# Altium PCB PCB1.PcbDoc
Units mm, origin at the board's own origin, x right, y up, seen from the top; angles counter-clockwise.
Board outline 55 x 34 mm, 2 copper layers (Top Layer, Bottom Layer); 146 components, 18 nets, 318 pads, 131 vias.
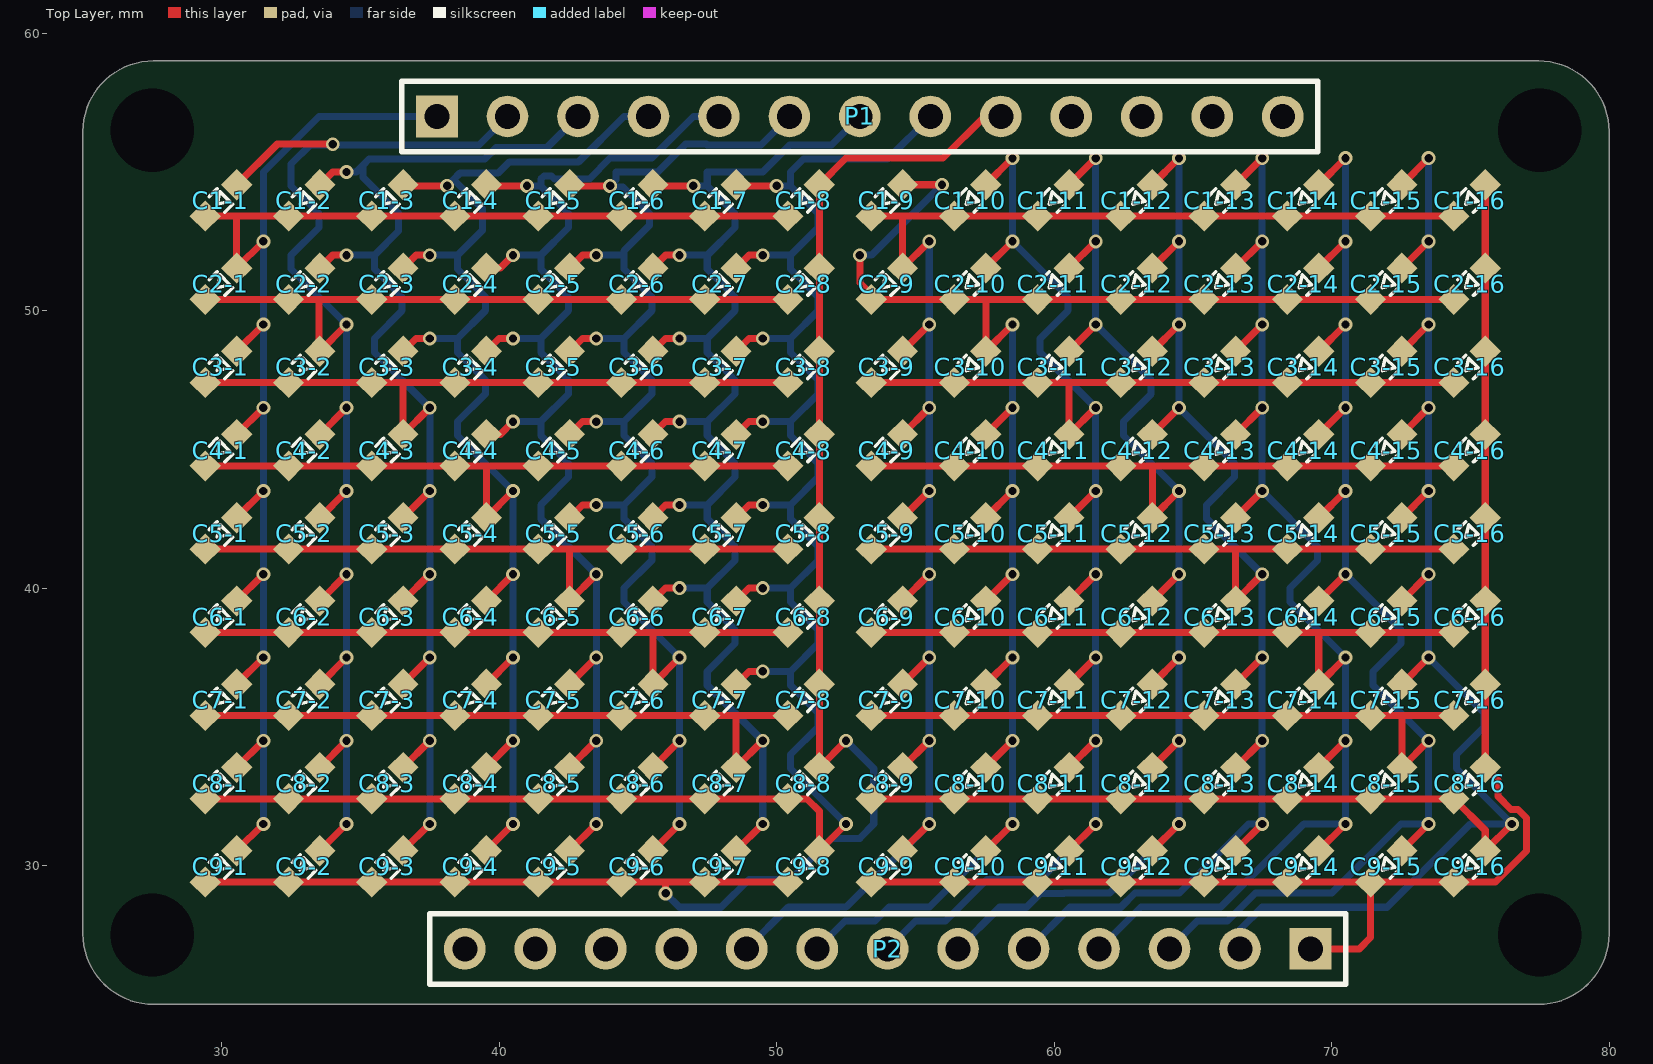
[diagram p0: Top Layer view]
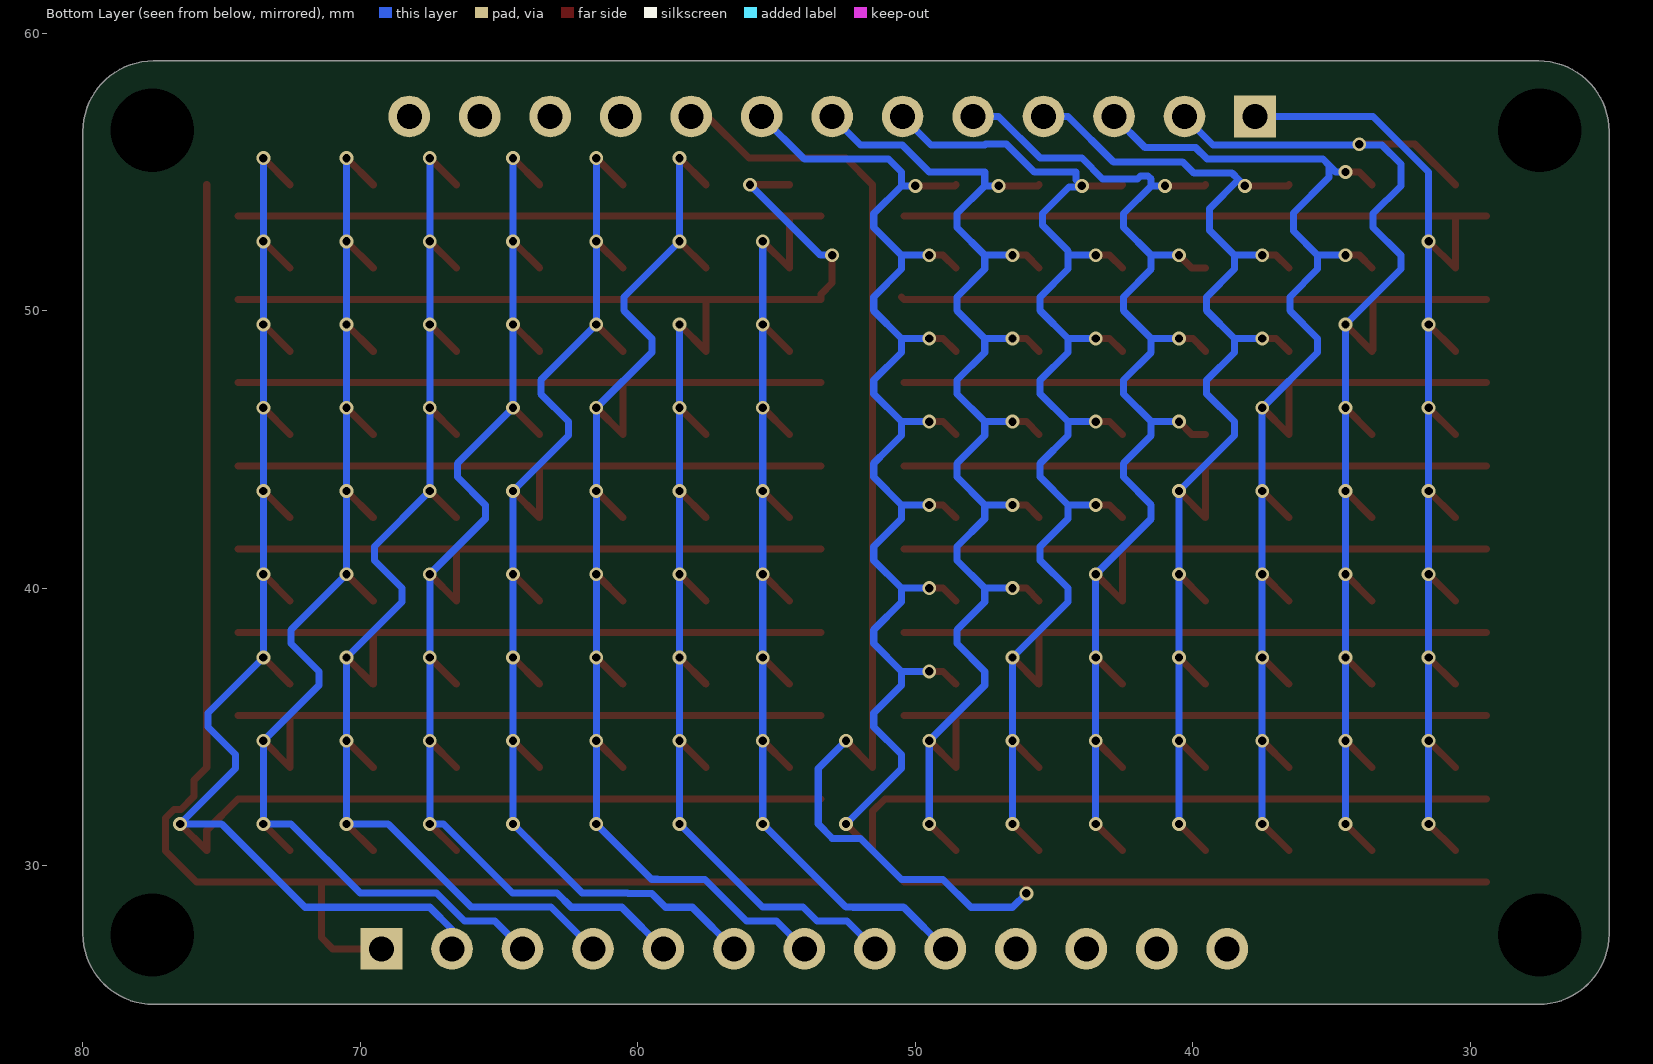
[diagram p1: Bottom Layer view, seen from below]

## Layer stack, top to bottom
Top Solder: solder mask 0.0102, Solder Resist, Dk 3.5
Top Layer: signal copper 0.0356
Dielectric 1: dielectric 0.32, FR-4, Dk 4.8
Bottom Layer: signal copper 0.0356
Bottom Solder: solder mask 0.0102, Solder Resist, Dk 3.5

## Board outline
77.46,59 cw(c77.46,56.46) 80,56.46 80,27.54 cw(c77.46,27.54) 77.46,25 27.54,25 cw(c27.54,27.54) 25,27.54 25,56.46 cw(c27.54,56.46) 27.54,59

## Design rules (kind name [scope] priority, off if disabled: settings)
Clearance [All] p1: gap=0.152 ignorepadtopadclearanceinfootprint=FALSE except(0: Arc-Hole Track-Hole SMDPad-Hole THPad-Hole Via-Hole Fill-Hole Poly-Hole Region-Hole Text-Hole; 0.254: Arc-Arc Arc-Track Track-Track)
ComponentClearance [All] p1: gap=0 collisioncheckmode=3 verticalgap=0.254 showdistances=FALSE
PolygonConnect [All] p1: connectstyle=Relief reliefconductorwidth=0.254 reliefentries=4 polygonreliefangle="90 Angle" airgapwidth=0.254
RoutingVias [All] p1: holewidth=0.3 width=0.5 viastyle="Through Hole" minholewidth=0.3 minwidth=0.5 maxholewidth=0.3 maxwidth=0.5
SolderMaskExpansion [All] p1: expansion=0.102
Width [All] p1: maxlimit=0.254 minlimit=0.254 preferedwidth=0.254
29 further rules are at their usual default settings.

## Components (designator, comment, footprint, x,y, rotation, side; value= is the part's Value field where it differs from the comment)
C1-1 "LED" "LED 0603(2)" 30,54 r225 bottom
C1-2 "LED" "LED 0603(2)" 33,54 r225 bottom
C1-3 "LED" "LED 0603(2)" 36,54 r225 bottom
C1-4 "LED" "LED 0603(2)" 39,54 r225 bottom
C1-5 "LED" "LED 0603(2)" 42,54 r225 bottom
C1-6 "LED" "LED 0603(2)" 45,54 r225 bottom
C1-7 "LED" "LED 0603(2)" 48,54 r225 bottom
C1-8 "LED" "LED 0603(2)" 51,54 r225 bottom
C1-9 "LED" "LED 0603(2)" 54,54 r225 bottom
C1-10 "LED" "LED 0603(2)" 57,54 r225 bottom
C1-11 "LED" "LED 0603(2)" 60,54 r225 bottom
C1-12 "LED" "LED 0603(2)" 63,54 r225 bottom
C1-13 "LED" "LED 0603(2)" 66,54 r225 bottom
C1-14 "LED" "LED 0603(2)" 69,54 r225 bottom
C1-15 "LED" "LED 0603(2)" 72,54 r225 bottom
C1-16 "LED" "LED 0603(2)" 75,54 r225 bottom
C2-1 "LED" "LED 0603(2)" 30,51 r225 bottom
C2-2 "LED" "LED 0603(2)" 33,51 r225 bottom
C2-3 "LED" "LED 0603(2)" 36,51 r225 bottom
C2-4 "LED" "LED 0603(2)" 39,51 r225 bottom
C2-5 "LED" "LED 0603(2)" 42,51 r225 bottom
C2-6 "LED" "LED 0603(2)" 45,51 r225 bottom
C2-7 "LED" "LED 0603(2)" 48,51 r225 bottom
C2-8 "LED" "LED 0603(2)" 51,51 r225 bottom
C2-9 "LED" "LED 0603(2)" 54,51 r225 bottom
C2-10 "LED" "LED 0603(2)" 57,51 r225 bottom
C2-11 "LED" "LED 0603(2)" 60,51 r225 bottom
C2-12 "LED" "LED 0603(2)" 63,51 r225 bottom
C2-13 "LED" "LED 0603(2)" 66,51 r225 bottom
C2-14 "LED" "LED 0603(2)" 69,51 r225 bottom
C2-15 "LED" "LED 0603(2)" 72,51 r225 bottom
C2-16 "LED" "LED 0603(2)" 75,51 r225 bottom
C3-1 "LED" "LED 0603(2)" 30,48 r225 bottom
C3-2 "LED" "LED 0603(2)" 33,48 r225 bottom
C3-3 "LED" "LED 0603(2)" 36,48 r225 bottom
C3-4 "LED" "LED 0603(2)" 39,48 r225 bottom
C3-5 "LED" "LED 0603(2)" 42,48 r225 bottom
C3-6 "LED" "LED 0603(2)" 45,48 r225 bottom
C3-7 "LED" "LED 0603(2)" 48,48 r225 bottom
C3-8 "LED" "LED 0603(2)" 51,48 r225 bottom
C3-9 "LED" "LED 0603(2)" 54,48 r225 bottom
C3-10 "LED" "LED 0603(2)" 57,48 r225 bottom
C3-11 "LED" "LED 0603(2)" 60,48 r225 bottom
C3-12 "LED" "LED 0603(2)" 63,48 r225 bottom
C3-13 "LED" "LED 0603(2)" 66,48 r225 bottom
C3-14 "LED" "LED 0603(2)" 69,48 r225 bottom
C3-15 "LED" "LED 0603(2)" 72,48 r225 bottom
C3-16 "LED" "LED 0603(2)" 75,48 r225 bottom
C4-1 "LED" "LED 0603(2)" 30,45 r225 bottom
C4-2 "LED" "LED 0603(2)" 33,45 r225 bottom
C4-3 "LED" "LED 0603(2)" 36,45 r225 bottom
C4-4 "LED" "LED 0603(2)" 39,45 r225 bottom
C4-5 "LED" "LED 0603(2)" 42,45 r225 bottom
C4-6 "LED" "LED 0603(2)" 45,45 r225 bottom
C4-7 "LED" "LED 0603(2)" 48,45 r225 bottom
C4-8 "LED" "LED 0603(2)" 51,45 r225 bottom
C4-9 "LED" "LED 0603(2)" 54,45 r225 bottom
C4-10 "LED" "LED 0603(2)" 57,45 r225 bottom
C4-11 "LED" "LED 0603(2)" 60,45 r225 bottom
C4-12 "LED" "LED 0603(2)" 63,45 r225 bottom
C4-13 "LED" "LED 0603(2)" 66,45 r225 bottom
C4-14 "LED" "LED 0603(2)" 69,45 r225 bottom
C4-15 "LED" "LED 0603(2)" 72,45 r225 bottom
C4-16 "LED" "LED 0603(2)" 75,45 r225 bottom
C5-1 "LED" "LED 0603(2)" 30,42 r225 bottom
C5-2 "LED" "LED 0603(2)" 33,42 r225 bottom
C5-3 "LED" "LED 0603(2)" 36,42 r225 bottom
C5-4 "LED" "LED 0603(2)" 39,42 r225 bottom
C5-5 "LED" "LED 0603(2)" 42,42 r225 bottom
C5-6 "LED" "LED 0603(2)" 45,42 r225 bottom
C5-7 "LED" "LED 0603(2)" 48,42 r225 bottom
C5-8 "LED" "LED 0603(2)" 51,42 r225 bottom
C5-9 "LED" "LED 0603(2)" 54,42 r225 bottom
C5-10 "LED" "LED 0603(2)" 57,42 r225 bottom
C5-11 "LED" "LED 0603(2)" 60,42 r225 bottom
C5-12 "LED" "LED 0603(2)" 63,42 r225 bottom
C5-13 "LED" "LED 0603(2)" 66,42 r225 bottom
C5-14 "LED" "LED 0603(2)" 69,42 r225 bottom
C5-15 "LED" "LED 0603(2)" 72,42 r225 bottom
C5-16 "LED" "LED 0603(2)" 75,42 r225 bottom
C6-1 "LED" "LED 0603(2)" 30,39 r225 bottom
C6-2 "LED" "LED 0603(2)" 33,39 r225 bottom
C6-3 "LED" "LED 0603(2)" 36,39 r225 bottom
C6-4 "LED" "LED 0603(2)" 39,39 r225 bottom
C6-5 "LED" "LED 0603(2)" 42,39 r225 bottom
C6-6 "LED" "LED 0603(2)" 45,39 r225 bottom
C6-7 "LED" "LED 0603(2)" 48,39 r225 bottom
C6-8 "LED" "LED 0603(2)" 51,39 r225 bottom
C6-9 "LED" "LED 0603(2)" 54,39 r225 bottom
C6-10 "LED" "LED 0603(2)" 57,39 r225 bottom
C6-11 "LED" "LED 0603(2)" 60,39 r225 bottom
C6-12 "LED" "LED 0603(2)" 63,39 r225 bottom
C6-13 "LED" "LED 0603(2)" 66,39 r225 bottom
C6-14 "LED" "LED 0603(2)" 69,39 r225 bottom
C6-15 "LED" "LED 0603(2)" 72,39 r225 bottom
C6-16 "LED" "LED 0603(2)" 75,39 r225 bottom
C7-1 "LED" "LED 0603(2)" 30,36 r225 bottom
C7-2 "LED" "LED 0603(2)" 33,36 r225 bottom
C7-3 "LED" "LED 0603(2)" 36,36 r225 bottom
C7-4 "LED" "LED 0603(2)" 39,36 r225 bottom
C7-5 "LED" "LED 0603(2)" 42,36 r225 bottom
C7-6 "LED" "LED 0603(2)" 45,36 r225 bottom
C7-7 "LED" "LED 0603(2)" 48,36 r225 bottom
C7-8 "LED" "LED 0603(2)" 51,36 r225 bottom
C7-9 "LED" "LED 0603(2)" 54,36 r225 bottom
C7-10 "LED" "LED 0603(2)" 57,36 r225 bottom
C7-11 "LED" "LED 0603(2)" 60,36 r225 bottom
C7-12 "LED" "LED 0603(2)" 63,36 r225 bottom
C7-13 "LED" "LED 0603(2)" 66,36 r225 bottom
C7-14 "LED" "LED 0603(2)" 69,36 r225 bottom
C7-15 "LED" "LED 0603(2)" 72,36 r225 bottom
C7-16 "LED" "LED 0603(2)" 75,36 r225 bottom
C8-1 "LED" "LED 0603(2)" 30,33 r225 bottom
C8-2 "LED" "LED 0603(2)" 33,33 r225 bottom
C8-3 "LED" "LED 0603(2)" 36,33 r225 bottom
C8-4 "LED" "LED 0603(2)" 39,33 r225 bottom
C8-5 "LED" "LED 0603(2)" 42,33 r225 bottom
C8-6 "LED" "LED 0603(2)" 45,33 r225 bottom
C8-7 "LED" "LED 0603(2)" 48,33 r225 bottom
C8-8 "LED" "LED 0603(2)" 51,33 r225 bottom
C8-9 "LED" "LED 0603(2)" 54,33 r225 bottom
C8-10 "LED" "LED 0603(2)" 57,33 r225 bottom
C8-11 "LED" "LED 0603(2)" 60,33 r225 bottom
C8-12 "LED" "LED 0603(2)" 63,33 r225 bottom
C8-13 "LED" "LED 0603(2)" 66,33 r225 bottom
C8-14 "LED" "LED 0603(2)" 69,33 r225 bottom
C8-15 "LED" "LED 0603(2)" 72,33 r225 bottom
C8-16 "LED" "LED 0603(2)" 75,33 r225 bottom
C9-1 "LED" "LED 0603(2)" 30,30 r225 bottom
C9-2 "LED" "LED 0603(2)" 33,30 r225 bottom
C9-3 "LED" "LED 0603(2)" 36,30 r225 bottom
C9-4 "LED" "LED 0603(2)" 39,30 r225 bottom
C9-5 "LED" "LED 0603(2)" 42,30 r225 bottom
C9-6 "LED" "LED 0603(2)" 45,30 r225 bottom
C9-7 "LED" "LED 0603(2)" 48,30 r225 bottom
C9-8 "LED" "LED 0603(2)" 51,30 r225 bottom
C9-9 "LED" "LED 0603(2)" 54,30 r225 bottom
C9-10 "LED" "LED 0603(2)" 57,30 r225 bottom
C9-11 "LED" "LED 0603(2)" 60,30 r225 bottom
C9-12 "LED" "LED 0603(2)" 63,30 r225 bottom
C9-13 "LED" "LED 0603(2)" 66,30 r225 bottom
C9-14 "LED" "LED 0603(2)" 69,30 r225 bottom
C9-15 "LED" "LED 0603(2)" 72,30 r225 bottom
C9-16 "LED" "LED 0603(2)" 75,30 r225 bottom
P1 "Header 13" HDR1X13 37.76,57 r0 top
P2 "Header 13" HDR1X13 69.24,27 r180 top

## Footprints (in the part's own frame and the unit in brackets; to place one, negate y for a bottom-side part, rotate by r counter-clockwise, add the part's x,y. Pads: shape width x height; smd on the part's side, far side on the other; paste and mask are expansions set on the pad)
HDR1X13 [mm] "Connector; Header; 13 Position"
  rect 1.5x1.5 hole 0.9: 1(0,0)
  round 1.5 hole 0.9: 2(2.54,0) 3(5.08,0) 4(7.62,0) 5(10.16,0) 6(12.7,0) 7(15.24,0) 8(17.78,0) 9(20.32,0) 10(22.86,0) 11(25.4,0) 12(27.94,0) 13(30.48,0)
  silkscreen extent -1.27,-1.27 31.75,1.27
"LED 0603(2)" [mm]
  rect 0.8x0.8 smd far side: 1(-0.762,0) 2(0.838,0)

## Part data
P1 P2: "Header, 13-Pin", LatestRevisionDate=17-Jul-2002, LatestRevisionNote="Re-released for DXP Platform.", Publisher="Altium Limited"

## Free pads (board coordinates)
  round 0 hole 3: 1(27.5,56.5) 2(77.5,56.5) 3(27.5,27.5) 4(77.5,27.5)

## Via types
v1: diameter 0.5, hole 0.3, Top Layer to Bottom Layer, 131 vias

## Nets (pads, with @x,y where several pads share a name; then routed paths per layer and width w, separated by ;. In a path a pad name is that pad's centre, name@x,y a point inside that pad or via, vN(x,y) a via of type N, cw(c..) or ccw(c..) an arc to the next point about the centre after c; other vN are vias at no path point)
CA1: C1-1.2 C1-2.2 C1-3.2 C1-4.2 C1-5.2 C1-6.2 C1-7.2 C1-8.2 C2-1.1 C3-1.1 C4-1.1 C5-1.1 C6-1.1 C7-1.1 C8-1.1 C9-1.1 P1.1 | length 64.3
  Top Layer w0.254: C1-1.2 30.5,53.407 ; C9-1.1 v1(31.5,31.5) ; C8-1.1 v1(31.5,34.5) ; C7-1.1 v1(31.5,37.5) ; C6-1.1 v1(31.5,40.5) ; C5-1.1 v1(31.5,43.5) ; C4-1.1 v1(31.5,46.5) ; C3-1.1 v1(31.5,49.5) ; v1(31.5,52.5) C2-1.1 30.539,53.369 30.5,53.407 ; C1-8.2 C1-7.2 C1-6.2 C1-5.2 C1-4.2 C1-3.2 C1-2.2 30.5,53.407
  Bottom Layer w0.254: v1(31.5,31.5) v1(31.5,34.5) v1(31.5,37.5) v1(31.5,40.5) v1(31.5,43.5) v1(31.5,46.5) v1(31.5,49.5) v1(31.5,52.5) 31.5,55 33.5,57 P1.1
CA2: C1-1.1 C2-1.2 C2-2.2 C2-3.2 C2-4.2 C2-5.2 C2-6.2 C2-7.2 C2-8.2 C3-2.1 C4-2.1 C5-2.1 C6-2.1 C7-2.1 C8-2.1 C9-2.1 P1.2 | length 70.5
  Top Layer w0.254: C2-1.2 C2-2.2 33.5,50.407 ; C1-1.1 32,56 v1(34,56) ; C9-2.1 v1(34.5,31.5) ; C8-2.1 v1(34.5,34.5) ; C7-2.1 v1(34.5,37.5) ; C6-2.1 v1(34.5,40.5) ; C5-2.1 v1(34.5,43.5) ; C4-2.1 v1(34.5,46.5) ; v1(34.5,49.5) C3-2.1 33.5,48.578 33.5,50.407 ; C2-8.2@50.5,50.5 C2-8.2 C2-7.2 C2-6.2 C2-5.2 C2-4.2 C2-3.2 33.5,50.407
  Bottom Layer w0.254: v1(34.5,31.5) v1(34.5,34.5) v1(34.5,37.5) v1(34.5,40.5) v1(34.5,43.5) v1(34.5,46.5) v1(34.5,49.5) 32.5,51.5 32.5,52 33.5,53 33.5,53.5 32.5,54.5 32.5,55.282 33.189,55.971 39.271,55.971 P1.2
CA3: C1-2.1 C2-2.1 C3-1.2 C3-2.2 C3-3.2 C3-4.2 C3-5.2 C3-6.2 C3-7.2 C3-8.2 C4-3.1 C5-3.1 C6-3.1 C7-3.1 C8-3.1 C9-3.1 P1.3 | length 69.8
  Top Layer w0.254: C3-1.2 C3-2.2 C3-3.2 36.5,47.407 ; C2-2.1 34,52 v1(34.5,52) ; C1-2.1 34,55 v1(34.5,55) ; C9-3.1 v1(37.5,31.5) ; C8-3.1 v1(37.5,34.5) ; C7-3.1 v1(37.5,37.5) ; C6-3.1 v1(37.5,40.5) ; C5-3.1 v1(37.5,43.5) ; v1(37.5,46.5) C4-3.1 36.539,47.369 36.5,47.407 ; C3-8.2 C3-7.2 C3-6.2 C3-5.2 C3-4.2 36.5,47.407
  Bottom Layer w0.254: v1(34.5,52) 35.5,52 ; v1(34.5,55) 34.85,55 35.1,55.25 ; v1(37.5,31.5) v1(37.5,34.5) v1(37.5,37.5) v1(37.5,40.5) v1(37.5,43.5) v1(37.5,46.5) 35.5,48.5 35.5,49 36.5,50 36.5,50.5 35.5,51.5 35.5,52 ; P1.3 41.715,55.875 39.893,55.875 39.481,55.463 35.313,55.463 35.1,55.25 ; 35.1,55.25 35.1,54.8 36.375,53.525 36.375,52.875 35.5,52
CA4: C1-3.1 C2-3.1 C3-3.1 C4-1.2 C4-2.2 C4-3.2 C4-4.2 C4-5.2 C4-6.2 C4-7.2 C4-8.2 C5-4.1 C6-4.1 C7-4.1 C8-4.1 C9-4.1 P1.4 | length 70.4
  Top Layer w0.254: C4-1.2 C4-2.2 C4-3.2 C4-4.2 39.5,44.407 ; C3-3.1 37,49 v1(37.5,49) ; C2-3.1 37,52 v1(37.5,52) ; C1-3.1 36.578,54.5 v1(38.125,54.5) ; C9-4.1 v1(40.5,31.5) ; C8-4.1 v1(40.5,34.5) ; C7-4.1 v1(40.5,37.5) ; C6-4.1 v1(40.5,40.5) ; v1(40.5,43.5) C5-4.1 39.539,44.369 39.5,44.407 ; C4-8.2 C4-7.2 C4-6.2 C4-5.2 39.5,44.407
  Bottom Layer w0.254: v1(37.5,49) 38.5,49 ; v1(37.5,52) 38.5,52 ; v1(38.125,54.5) 38.35,54.725 ; v1(40.5,31.5) v1(40.5,34.5) v1(40.5,37.5) v1(40.5,40.5) v1(40.5,43.5) 38.5,45.5 38.5,46 39.5,47 39.5,47.5 38.5,48.5 38.5,49 ; P1.4 44.5,57 42.867,55.367 40.367,55.367 39.955,54.955 38.58,54.955 38.35,54.725 ; 38.35,54.725 39.4,53.675 39.4,52.9 38.5,52 ; 38.5,49 39.5,50 39.5,50.5 38.5,51.5 38.5,52
CA5: C1-4.1 C2-4.1 C3-4.1 C4-4.1 C5-1.2 C5-2.2 C5-3.2 C5-4.2 C5-5.2 C5-6.2 C5-7.2 C5-8.2 C6-5.1 C7-5.1 C8-5.1 C9-5.1 P1.5 | length 71.6
  Top Layer w0.254: C5-1.2 C5-2.2 C5-3.2 C5-4.2 C5-5.2 42.5,41.407 ; C4-4.1 40.039,45.539 v1(40.5,46) ; C3-4.1 40,49 v1(40.5,49) ; C2-4.1 40.039,51.539 v1(40.5,52) ; C1-4.1 39.578,54.5 v1(41,54.5) ; C9-5.1 v1(43.5,31.5) ; C8-5.1 v1(43.5,34.5) ; C7-5.1 v1(43.5,37.5) ; v1(43.5,40.5) C6-5.1 42.539,41.369 42.5,41.407 ; C5-8.2 C5-7.2 C5-6.2 42.5,41.407
  Bottom Layer w0.254: v1(40.5,46) 41.5,46 ; v1(40.5,49) 41.5,49 ; v1(40.5,52) 41.5,52 ; v1(41,54.5) 41.5,54.5 ; v1(43.5,31.5) v1(43.5,34.5) v1(43.5,37.5) v1(43.5,40.5) 41.5,42.5 41.5,43 42.5,44 42.5,44.5 41.5,45.5 41.5,46 ; P1.5 47,57 45.5,55.5 44,55.5 43.25,54.75 42,54.75 41.891,54.859 41.609,54.859 41.5,54.75 41.5,54.5 ; 41.5,46 42.5,47 42.5,47.5 41.5,48.5 41.5,49 ; 41.5,49 42.5,50 42.5,50.5 41.5,51.5 41.5,52 ; 41.5,52 42.5,53 42.5,53.5 41.5,54.5
CA6: C1-5.1 C2-5.1 C3-5.1 C4-5.1 C5-5.1 C6-1.2 C6-2.2 C6-3.2 C6-4.2 C6-5.2 C6-6.2 C6-7.2 C6-8.2 C7-6.1 C8-6.1 C9-6.1 P1.6 | length 72.8
  Top Layer w0.254: C6-1.2 C6-2.2 C6-3.2 C6-4.2 C6-5.2 C6-6.2 45.5,38.407 ; C5-5.1 43,43 v1(43.5,43) ; C4-5.1 43,46 v1(43.5,46) ; C3-5.1 43,49 v1(43.5,49) ; C2-5.1 43,52 v1(43.5,52) ; C1-5.1 42.578,54.5 v1(44,54.5) ; C9-6.1 v1(46.5,31.5) ; C8-6.1 v1(46.5,34.5) ; v1(46.5,37.5) C7-6.1 45.539,38.369 45.5,38.407 ; C6-8.2 C6-7.2 45.5,38.407
  Bottom Layer w0.254: v1(43.5,43) 44.5,43 ; v1(43.5,46) 44.5,46 ; v1(43.5,49) 44.5,49 ; v1(43.5,52) 44.5,52 ; v1(44,54.5) 44.04,54.46 44.46,54.46 45.421,53.5 45.421,53.079 44.5,52.158 44.5,52 ; 44.21,54.71 44.21,54.992 45.71,54.992 46.718,56 47.465,56 47.494,55.971 49.431,55.971 P1.6 ; v1(46.5,31.5) v1(46.5,34.5) v1(46.5,37.5) 44.5,39.5 44.5,40 45.5,41 45.5,41.5 44.5,42.5 44.5,43 ; 44.5,43 45.5,44 45.5,44.5 44.5,45.5 44.5,46 ; 44.5,46 45.5,47 45.5,47.5 44.5,48.5 44.5,49 ; 44.5,49 45.5,50 45.5,50.5 44.5,51.5 44.5,52
CA7: C1-6.1 C2-6.1 C3-6.1 C4-6.1 C5-6.1 C6-6.1 C7-1.2 C7-2.2 C7-3.2 C7-4.2 C7-5.2 C7-6.2 C7-7.2 C7-8.2 C8-7.1 C9-7.1 P1.7 | length 74
  Top Layer w0.254: C7-1.2 C7-2.2 C7-3.2 C7-4.2 C7-5.2 C7-6.2 C7-7.2 48.5,35.407 ; C6-6.1 46,40 v1(46.5,40) ; C5-6.1 46,43 v1(46.5,43) ; C4-6.1 46,46 v1(46.5,46) ; C3-6.1 46,49 v1(46.5,49) ; C2-6.1 46,52 v1(46.5,52) ; C1-6.1 45.578,54.5 v1(47,54.5) ; C9-7.1 v1(49.5,31.5) ; v1(49.5,34.5) C8-7.1 48.539,35.369 48.5,35.407 ; C7-8.2 48.5,35.407
  Bottom Layer w0.254: v1(46.5,40) 47.5,40 ; v1(46.5,43) 47.5,43 ; v1(46.5,46) 47.5,46 ; v1(46.5,49) 47.5,49 ; v1(46.5,52) 47.5,52 ; v1(47,54.5) 47.5,54.5 ; v1(49.5,31.5) v1(49.5,34.5) 47.5,36.5 47.5,37 48.5,38 48.5,38.5 47.5,39.5 47.5,40 ; P1.7 51.971,55.971 50.471,55.971 49.5,55 47.5,55 47.5,54.5 ; 47.5,40 48.5,41 48.5,41.5 47.5,42.5 47.5,43 ; 47.5,43 48.5,44 48.5,44.5 47.5,45.5 47.5,46 ; 47.5,46 48.5,47 48.5,47.5 47.5,48.5 47.5,49 ; 47.5,49 48.5,50 48.5,50.5 47.5,51.5 47.5,52 ; 47.5,52 48.5,53 48.5,53.5 47.5,54.5
CA8: C1-7.1 C2-7.1 C3-7.1 C4-7.1 C5-7.1 C6-7.1 C7-7.1 C8-1.2 C8-2.2 C8-3.2 C8-4.2 C8-5.2 C8-6.2 C8-7.2 C8-8.2 C9-8.1 P1.8 | length 76
  Top Layer w0.254: C8-1.2 C8-2.2 C8-3.2 C8-4.2 C8-5.2 C8-6.2 C8-7.2 C8-8.2 51.093,32.407 51.539,31.961 C9-8.1 v1(52.5,31.5) ; C7-7.1 49,37 v1(49.5,37) ; C6-7.1 49,40 v1(49.5,40) ; C5-7.1 49,43 v1(49.5,43) ; C4-7.1 49,46 v1(49.5,46) ; C3-7.1 49,49 v1(49.5,49) ; C2-7.1 49,52 v1(49.5,52) ; C1-7.1 48.578,54.5 v1(50,54.5)
  Bottom Layer w0.254: v1(49.5,37) 50.5,37 ; v1(49.5,40) 50.5,40 ; v1(49.5,43) 50.5,43 ; v1(49.5,46) 50.5,46 ; v1(49.5,49) 50.5,49 ; v1(49.5,52) 50.5,52 ; v1(50,54.5) 50.5,54.5 ; v1(52.5,31.5) 50.5,33.5 50.5,34 51.5,35 51.5,35.5 50.5,36.5 50.5,37 ; P1.8 54.003,55.463 50.963,55.463 50.5,55 50.5,54.5 ; 50.5,37 51.5,38 51.5,38.5 50.5,39.5 50.5,40 ; 50.5,40 51.5,41 51.5,41.5 50.5,42.5 50.5,43 ; 50.5,43 51.5,44 51.5,44.5 51,45 50.5,45.5 50.5,46 ; 50.5,46 51.5,47 51.5,47.5 50.5,48.5 50.5,49 ; 50.5,49 51.5,50 51.5,50.5 50.5,51.5 50.5,52 ; 50.5,52 51.5,53 51.5,53.5 50.5,54.5
CA9: C1-8.1 C2-8.1 C3-8.1 C4-8.1 C5-8.1 C6-8.1 C7-8.1 C8-8.1 C9-1.2 C9-2.2 C9-3.2 C9-4.2 C9-5.2 C9-6.2 C9-7.2 C9-8.2 P1.9 | length 63.7
  Top Layer w0.254: C9-1.2 C9-2.2 C9-3.2 C9-4.2 C9-5.2 C9-6.2 46,29.407 ; v1(46,29) 46,29.407 ; C9-8.2 C9-7.2 46,29.407 ; v1(52.5,34.5) C8-8.1 C7-8.1 C6-8.1 C5-8.1 C4-8.1 C3-8.1 C2-8.1 C1-8.1 52.5,55.5 56,55.5 57.5,57 P1.9
  Bottom Layer w0.254: v1(46,29) 46.5,28.5 48,28.5 49,29.5 50.5,29.5 51.971,30.971 53,30.971 53,31 53.5,31.5 53.5,33.5 v1(52.5,34.5)
CB1: C1-9.2 C1-10.2 C1-11.2 C1-12.2 C1-13.2 C1-14.2 C1-15.2 C1-16.2 C2-9.1 C3-9.1 C4-9.1 C5-9.1 C6-9.1 C7-9.1 C8-9.1 C9-9.1 P2.9 | length 63.2
  Top Layer w0.254: C1-9.2 54.5,53.407 ; C9-9.1 v1(55.5,31.5) ; C8-9.1 v1(55.5,34.5) ; C7-9.1 v1(55.5,37.5) ; C6-9.1 v1(55.5,40.5) ; C5-9.1 v1(55.5,43.5) ; C4-9.1 v1(55.5,46.5) ; C3-9.1 v1(55.5,49.5) ; v1(55.5,52.5) C2-9.1 54.539,53.369 54.5,53.407 ; C1-16.2 C1-15.2 C1-14.2 C1-13.2 C1-12.2 C1-11.2 C1-10.2 54.5,53.407
  Bottom Layer w0.254: P2.9 50.42,28.5 52.242,28.5 52.25,28.508 52.508,28.508 v1(55.5,31.5) v1(55.5,34.5) v1(55.5,37.5) v1(55.5,40.5) v1(55.5,43.5) v1(55.5,46.5) v1(55.5,49.5) v1(55.5,52.5)
CB2: C1-9.1 C2-9.2 C2-10.2 C2-11.2 C2-12.2 C2-13.2 C2-14.2 C2-15.2 C2-16.2 C3-10.1 C4-10.1 C5-10.1 C6-10.1 C7-10.1 C8-10.1 C9-10.1 P2.8 | length 66.5
  Top Layer w0.254: v1(53,52) 53,51 53.407,50.593 C2-9.2 C2-10.2 57.5,50.407 ; C1-9.1 v1(55.961,54.539) ; C9-10.1 v1(58.5,31.5) ; C8-10.1 v1(58.5,34.5) ; C7-10.1 v1(58.5,37.5) ; C6-10.1 v1(58.5,40.5) ; C5-10.1 v1(58.5,43.5) ; C4-10.1 v1(58.5,46.5) ; v1(58.5,49.5) C3-10.1 57.539,50.369 57.5,50.407 ; C2-16.2 C2-15.2 C2-14.2 C2-13.2 C2-12.2 C2-11.2 57.5,50.407
  Bottom Layer w0.254: P2.8 52.46,28 53.545,28 54.053,28.508 55.508,28.508 v1(58.5,31.5) v1(58.5,34.5) v1(58.5,37.5) v1(58.5,40.5) v1(58.5,43.5) v1(58.5,46.5) v1(58.5,49.5) ; v1(53,52) 53.422,52 v1(55.961,54.539)
CB3: C1-10.1 C2-10.1 C3-9.2 C3-10.2 C3-11.2 C3-12.2 C3-13.2 C3-14.2 C3-15.2 C3-16.2 C4-11.1 C5-11.1 C6-11.1 C7-11.1 C8-11.1 C9-11.1 P2.7 | length 69.2
  Top Layer w0.254: C3-9.2 C3-10.2 C3-11.2 60.5,47.407 ; C2-10.1 v1(58.5,52.5) ; C1-10.1 v1(58.5,55.5) ; C9-11.1 v1(61.5,31.5) ; C8-11.1 v1(61.5,34.5) ; C7-11.1 v1(61.5,37.5) ; C6-11.1 v1(61.5,40.5) ; C5-11.1 v1(61.5,43.5) ; v1(61.5,46.5) C4-11.1 60.539,47.369 60.5,47.407 ; C3-16.2 C3-15.2 C3-14.2 C3-13.2 C3-12.2 60.5,47.407
  Bottom Layer w0.254: P2.7 55,28 56.085,28 57.585,29.5 59.282,29.5 59.29,29.508 59.508,29.508 v1(61.5,31.5) v1(61.5,34.5) v1(61.5,37.5) v1(61.5,40.5) v1(61.5,43.5) v1(61.5,46.5) 59.5,48.5 59.5,49 60.5,50 60.5,50.5 v1(58.5,52.5) v1(58.5,55.5)
CB4: C1-11.1 C2-11.1 C3-11.1 C4-9.2 C4-10.2 C4-11.2 C4-12.2 C4-13.2 C4-14.2 C4-15.2 C4-16.2 C5-12.1 C6-12.1 C7-12.1 C8-12.1 C9-12.1 P2.6 | length 69.7
  Top Layer w0.254: C4-9.2 C4-10.2 C4-11.2 C4-12.2 63.5,44.407 ; C3-11.1 v1(61.5,49.5) ; C2-11.1 v1(61.5,52.5) ; C1-11.1 v1(61.5,55.5) ; C9-12.1 v1(64.5,31.5) ; C8-12.1 v1(64.5,34.5) ; C7-12.1 v1(64.5,37.5) ; C6-12.1 v1(64.5,40.5) ; v1(64.5,43.5) C5-12.1 63.539,44.369 63.5,44.407 ; C4-16.2 C4-15.2 C4-14.2 C4-13.2 63.5,44.407
  Bottom Layer w0.254: P2.6 58.04,28.5 59,28.5 59.5,29 60.362,29 60.37,29.008 62.008,29.008 v1(64.5,31.5) v1(64.5,34.5) v1(64.5,37.5) v1(64.5,40.5) v1(64.5,43.5) 62.5,45.5 62.5,46 63.5,47 63.5,47.5 v1(61.5,49.5) v1(61.5,52.5) v1(61.5,55.5)
CB5: C1-12.1 C2-12.1 C3-12.1 C4-12.1 C5-9.2 C5-10.2 C5-11.2 C5-12.2 C5-13.2 C5-14.2 C5-15.2 C5-16.2 C6-13.1 C7-13.1 C8-13.1 C9-13.1 P2.5 | length 70.1
  Top Layer w0.254: C5-9.2 C5-10.2 C5-11.2 C5-12.2 C5-13.2 66.5,41.407 ; C4-12.1 v1(64.5,46.5) ; C3-12.1 v1(64.5,49.5) ; C2-12.1 v1(64.5,52.5) ; C1-12.1 v1(64.5,55.5) ; C9-13.1 v1(67.5,31.5) ; C8-13.1 v1(67.5,34.5) ; C7-13.1 v1(67.5,37.5) ; v1(67.5,40.5) C6-13.1 66.539,41.369 66.5,41.407 ; C5-16.2 C5-15.2 C5-14.2 66.5,41.407
  Bottom Layer w0.254: P2.5 60.58,28.5 62.402,28.5 62.918,29.016 64.516,29.016 67,31.5 v1(67.5,31.5) v1(67.5,34.5) v1(67.5,37.5) v1(67.5,40.5) 65.5,42.5 65.5,43 66.5,44 66.5,44.5 v1(64.5,46.5) v1(64.5,49.5) v1(64.5,52.5) v1(64.5,55.5)
CB6: C1-13.1 C2-13.1 C3-13.1 C4-13.1 C5-13.1 C6-9.2 C6-10.2 C6-11.2 C6-12.2 C6-13.2 C6-14.2 C6-15.2 C6-16.2 C7-14.1 C8-14.1 C9-14.1 P2.4 | length 70.6
  Top Layer w0.254: C6-9.2 C6-10.2 C6-11.2 C6-12.2 C6-13.2 C6-14.2 69.5,38.407 ; C5-13.1 v1(67.5,43.5) ; C4-13.1 v1(67.5,46.5) ; C3-13.1 v1(67.5,49.5) ; C2-13.1 v1(67.5,52.5) ; C1-13.1 v1(67.5,55.5) ; C9-14.1 v1(70.5,31.5) ; C8-14.1 v1(70.5,34.5) ; v1(70.5,37.5) C7-14.1 69.539,38.369 69.5,38.407 ; C6-16.2 C6-15.2 69.5,38.407
  Bottom Layer w0.254: P2.4 63.128,28.508 66.008,28.508 69,31.5 v1(70.5,31.5) v1(70.5,34.5) v1(70.5,37.5) 68.5,39.5 68.5,40 69.5,41 69.5,41.5 v1(67.5,43.5) v1(67.5,46.5) v1(67.5,49.5) v1(67.5,52.5) v1(67.5,55.5)
CB7: C1-14.1 C2-14.1 C3-14.1 C4-14.1 C5-14.1 C6-14.1 C7-9.2 C7-10.2 C7-11.2 C7-12.2 C7-13.2 C7-14.2 C7-15.2 C7-16.2 C8-15.1 C9-15.1 P2.3 | length 71
  Top Layer w0.254: C7-9.2 C7-10.2 C7-11.2 C7-12.2 C7-13.2 C7-14.2 C7-15.2 72.5,35.407 ; C6-14.1 v1(70.5,40.5) ; C5-14.1 v1(70.5,43.5) ; C4-14.1 v1(70.5,46.5) ; C3-14.1 v1(70.5,49.5) ; C2-14.1 v1(70.5,52.5) ; C1-14.1 v1(70.5,55.5) ; C9-15.1 v1(73.5,31.5) ; v1(73.5,34.5) C8-15.1 72.539,35.369 72.5,35.407 ; C7-16.2 72.5,35.407
  Bottom Layer w0.254: P2.3 65.16,28 66.245,28 67.253,29.008 70.008,29.008 72.5,31.5 v1(73.5,31.5) v1(73.5,34.5) 71.5,36.5 71.5,37 72.5,38 72.5,38.5 v1(70.5,40.5) v1(70.5,43.5) v1(70.5,46.5) v1(70.5,49.5) v1(70.5,52.5) v1(70.5,55.5)
CB8: C1-15.1 C2-15.1 C3-15.1 C4-15.1 C5-15.1 C6-15.1 C7-15.1 C8-9.2 C8-10.2 C8-11.2 C8-12.2 C8-13.2 C8-14.2 C8-15.2 C8-16.2 C9-16.1 P2.2 | length 72.4
  Top Layer w0.254: C8-9.2 C8-10.2 C8-11.2 C8-12.2 C8-13.2 C8-14.2 C8-15.2 C8-16.2 75.539,31.276 C9-16.1 v1(76.5,31.5) ; C7-15.1 v1(73.5,37.5) ; C6-15.1 v1(73.5,40.5) ; C5-15.1 v1(73.5,43.5) ; C4-15.1 v1(73.5,46.5) ; C3-15.1 v1(73.5,49.5) ; C2-15.1 v1(73.5,52.5) ; C1-15.1 v1(73.5,55.5)
  Bottom Layer w0.254: P2.2 66.7,27.7 67.5,28.5 72,28.5 75,31.5 v1(76.5,31.5) 74.5,33.5 74.5,34 75.5,35 75.5,35.5 v1(73.5,37.5) v1(73.5,40.5) v1(73.5,43.5) v1(73.5,46.5) v1(73.5,49.5) v1(73.5,52.5) v1(73.5,55.5)
CB9: C1-16.1 C2-16.1 C3-16.1 C4-16.1 C5-16.1 C6-16.1 C7-16.1 C8-16.1 C9-9.2 C9-10.2 C9-11.2 C9-12.2 C9-13.2 C9-14.2 C9-15.2 C9-16.2 P2.1 | length 53.2
  Top Layer w0.254: C9-9.2 C9-10.2 C9-11.2 C9-12.2 C9-13.2 C9-14.2 C9-15.2 ; P2.1 71,27 71.407,27.407 C9-15.2 ; C1-16.1 C3-16.1 C4-16.1 C5-16.1 C6-16.1 C7-16.1 C8-16.1 76,33.078 76,32.5 76.471,32.029 76.719,32.029 77.029,31.719 77.029,30.529 75.907,29.407 C9-16.2 C9-15.2
pads on no net: P1.10 P1.11 P1.12 P1.13 P2.10 P2.11 P2.12 P2.13

## Silkscreen, mask and mechanical layers (free items; w line width, h text height)
Mechanical 1:
  lines w0.254: 25,27.5 ccw(c27.5,27.5) 27.5,25 77.5,25 ccw(c77.5,27.5) 80,27.5 80,56.5 ccw(c77.5,56.5) 77.5,59 27.5,59 ccw(c27.5,56.5) 25,56.5 25,27.5